# Altium PCB PCB1.PcbDoc
Units mm, origin at the board's own origin, x right, y up, seen from the top; angles counter-clockwise.
Board outline 34.8 x 12.71 mm, 2 copper layers (Top Layer, Bottom Layer); 3 components, 0 nets, 11 pads, 0 vias.
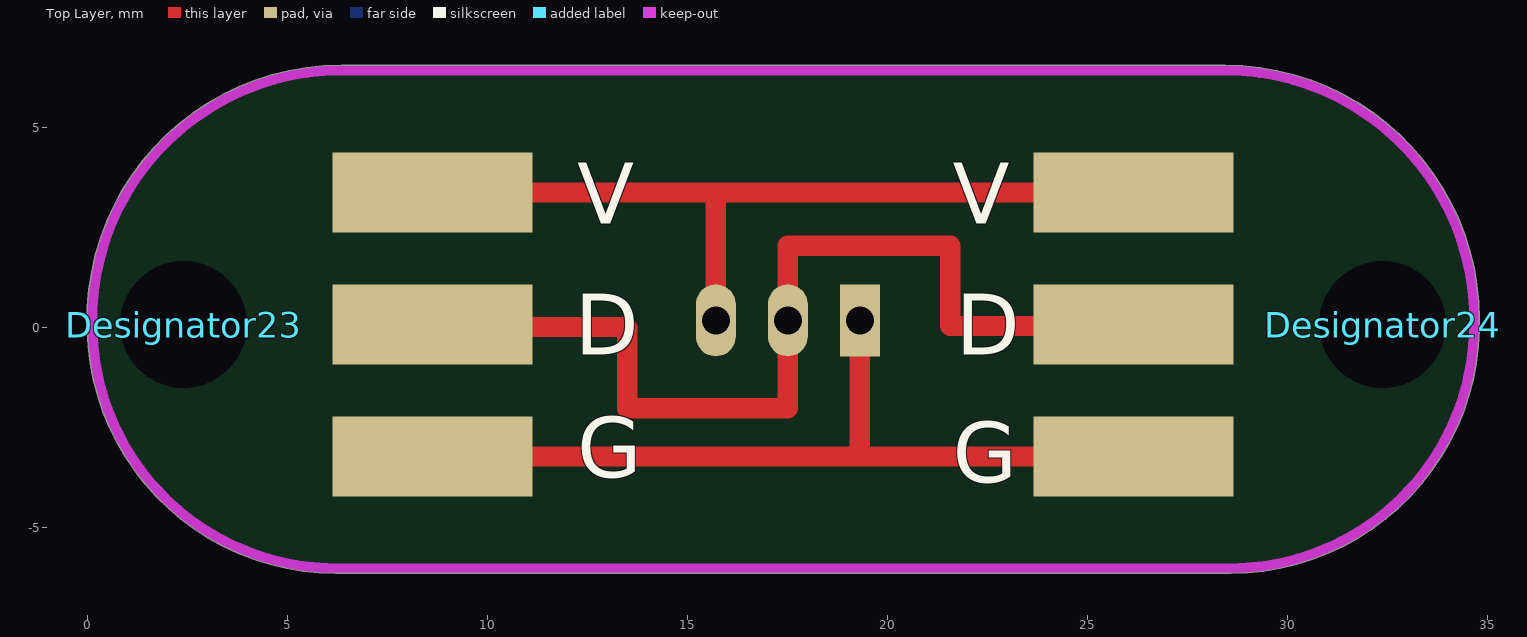
[diagram p0: Top Layer view]
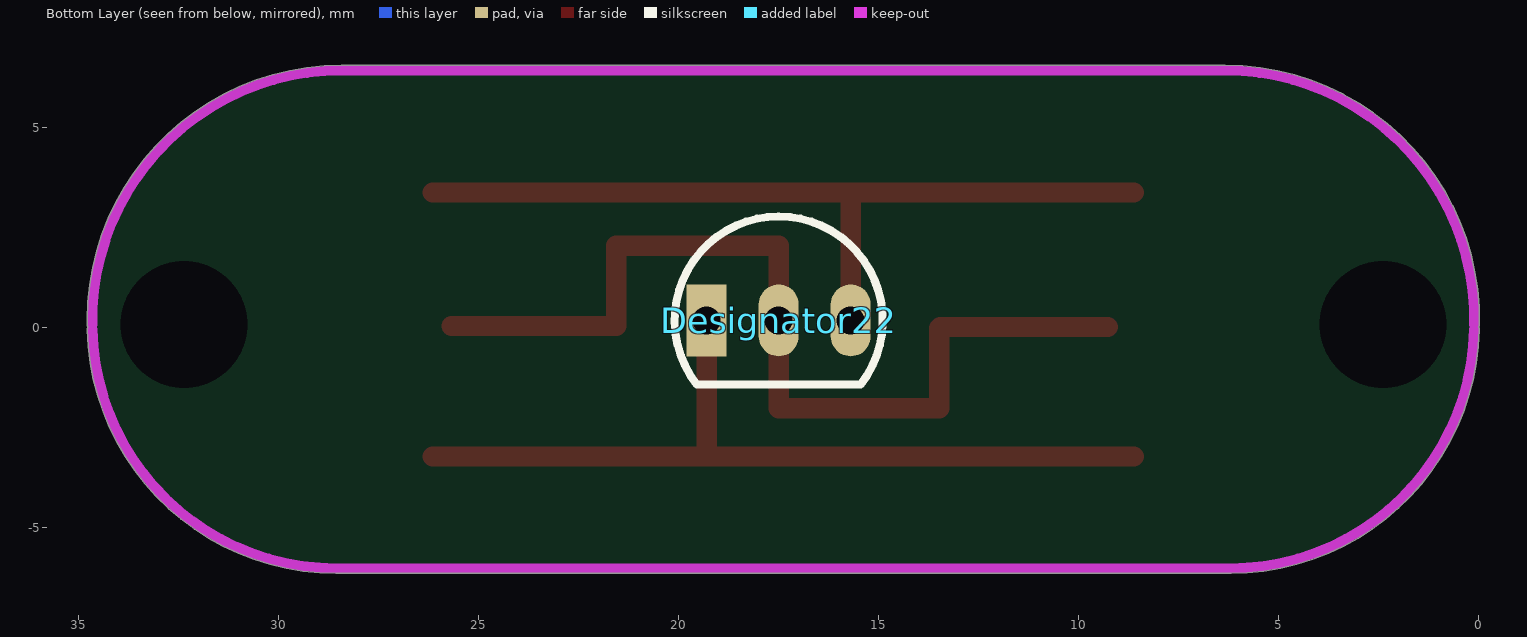
[diagram p1: Bottom Layer view, seen from below]

## Layer stack, top to bottom
Top Solder: solder mask 0.0102, Solder Resist, Dk 3.5
Top Layer: signal copper 0.0356
Dielectric 1: dielectric 0.32, FR-4, Dk 4.8
Bottom Layer: signal copper 0.0356
Bottom Solder: solder mask 0.0102, Solder Resist, Dk 3.5

## Board outline
-0.015,-0.064 ccw(c6.209,0.065) 6.207,-6.16 ccw(c6.211,-6.033) 6.211,-6.16 28.559,-6.16 ccw(c28.561,0.065) 34.785,-0.064 ccw(c34.658,-0.061) 34.785,-0.061 ccw(c34.658,-0.061) 34.77,0 ccw(c34.659,0.063) 34.786,0.06 ccw(c28.432,0.19) 34.788,0.19 ccw(c28.432,0.19) 28.432,6.546 ccw(c28.432,6.418) 28.396,6.54 6.374,6.54 ccw(c6.338,6.418) 6.338,6.546 ccw(c6.338,0.19) -0.016,0.06 ccw(c0.111,0.063) 0.001,0 ccw(c0.112,-0.061)

## Design rules (kind name [scope] priority, off if disabled: settings)
Clearance [All] p1: gap=0.254
PolygonConnect [All] p1: connectstyle=Relief reliefconductorwidth=0.254 reliefentries=4 polygonreliefangle="90 Angle" airgapwidth=0.254
RoutingVias [All] p1: holewidth=0.711 width=1.27 viastyle="Through Hole" minholewidth=0.711 minwidth=1.27 maxholewidth=0.711 maxwidth=1.27
SolderMaskExpansion [All] p1: expansion=0.102
UnpouredPolygon [All] p1: allowunpoured=FALSE
Width [All] p1: maxlimit=0.762 minlimit=0.254 preferedwidth=0.508
29 further rules are at their usual default settings.

## Components (designator, comment, footprint, x,y, rotation, side; value= is the part's Value field where it differs from the comment)
Designator22 "Comment" BJT-2N5551/160V/0.6A-TO92A 17.5,0.166 r90 bottom
Designator23 "Comment" "M3 125X200" 2.397,0.063 r0 top
Designator24 "Comment" "M3 125X200" 32.369,0.063 r0 top

## Footprints (in the part's own frame and the unit in brackets; to place one, negate y for a bottom-side part, rotate by r counter-clockwise, add the part's x,y. Pads: shape width x height; smd on the part's side, far side on the other; paste and mask are expansions set on the pad)
BJT-2N5551/160V/0.6A-TO92A [mm]
  oval 1.8x1 hole 0.7: B(0,0) C(0,-1.8)
  rect 1.8x1 hole 0.7: E(0,1.8)
  silkscreen extent -1.6,-2.6 2.6,2.6, body extent -1.3,-2.3 2.3,2.3, height 7.6
"M3 125X200" [mm] "M3螺丝孔，孔125Mil，焊盘200Mil"
  round 0 hole 3.175: 1(0,0)

## Free pads (board coordinates)
  rect 5x2 smd: 0(8.62,-3.239) 0(8.62,0.063) 0(8.62,3.365) 0(26.146,-3.239) 0(26.146,0.063) 0(26.146,3.365)

## Nets (pads, with @x,y where several pads share a name; then routed paths per layer and width w, separated by ;. In a path a pad name is that pad's centre, name@x,y a point inside that pad or via, vN(x,y) a via of type N, cw(c..) or ccw(c..) an arc to the next point about the centre after c; other vN are vias at no path point)
pads on no net: Designator22.B Designator22.C Designator22.E Designator23.1 Designator24.1
copper on no net: | length 65.9
  Top Layer w0.508: 8.62,-3.239 26.146,-3.239 ; 8.62,3.365 26.146,3.365 ; 9.271,0 13.462,0 13.488,-0.026 13.488,-2.032 17.5,-2.032 17.5,0.166 17.5,2.032 21.564,2.032 21.564,0.026 25.68,0.026 ; 15.7,0.166 15.7,3.127 ; 19.3,-3.235 19.3,0.166

## Keep-outs
Keep-Out Layer:
  lines w0.254: 0.111,0.063 cw(c6.338,0.19) 6.338,6.418 ; 0.112,-0.061 ccw(c6.209,0.065) 6.211,-6.033 26.781,-6.033 28.559,-6.033 ccw(c28.561,0.065) 34.658,-0.061 ; 6.338,6.413 23.86,6.413 28.427,6.413 ; 28.432,6.418 cw(c28.432,0.19) 34.659,0.063

## Silkscreen, mask and mechanical layers (free items; w line width, h text height)
Top Overlay:
  text "V" at 12.229,2.579 h1.52
  text "V" at 21.627,2.579 h1.52
  text "D" at 12.176,-0.699 h1.52
  text "D" at 21.701,-0.699 h1.52
  text "G" at 12.229,-3.771 h1.52
  text "G" at 21.627,-3.898 h1.52